# Altium PCB pcb_imge.PcbDoc
Units mm, origin at the board's own origin, x right, y up, seen from the top; angles counter-clockwise.
Board outline 152.4 x 101.6 mm, 2 copper layers (Top Layer, Bottom Layer); 12 components, 15 nets, 62 pads, 13 vias.
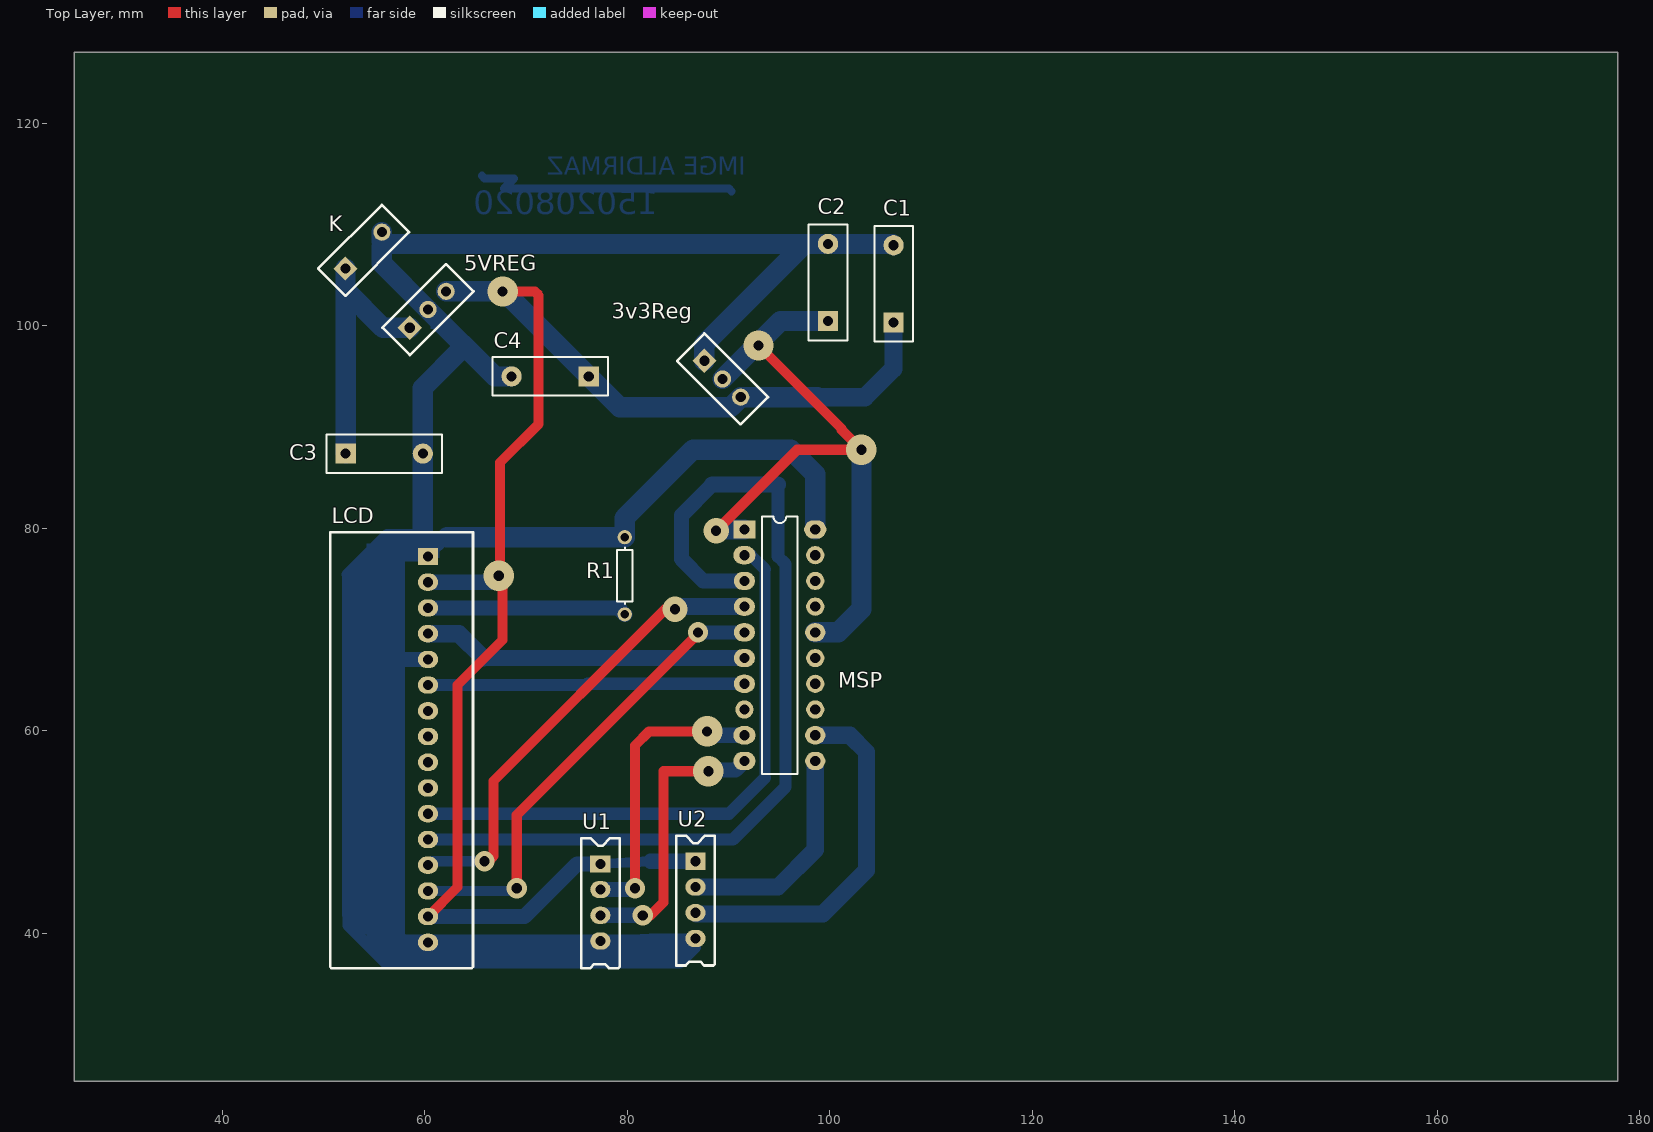
[diagram p0: Top Layer view]
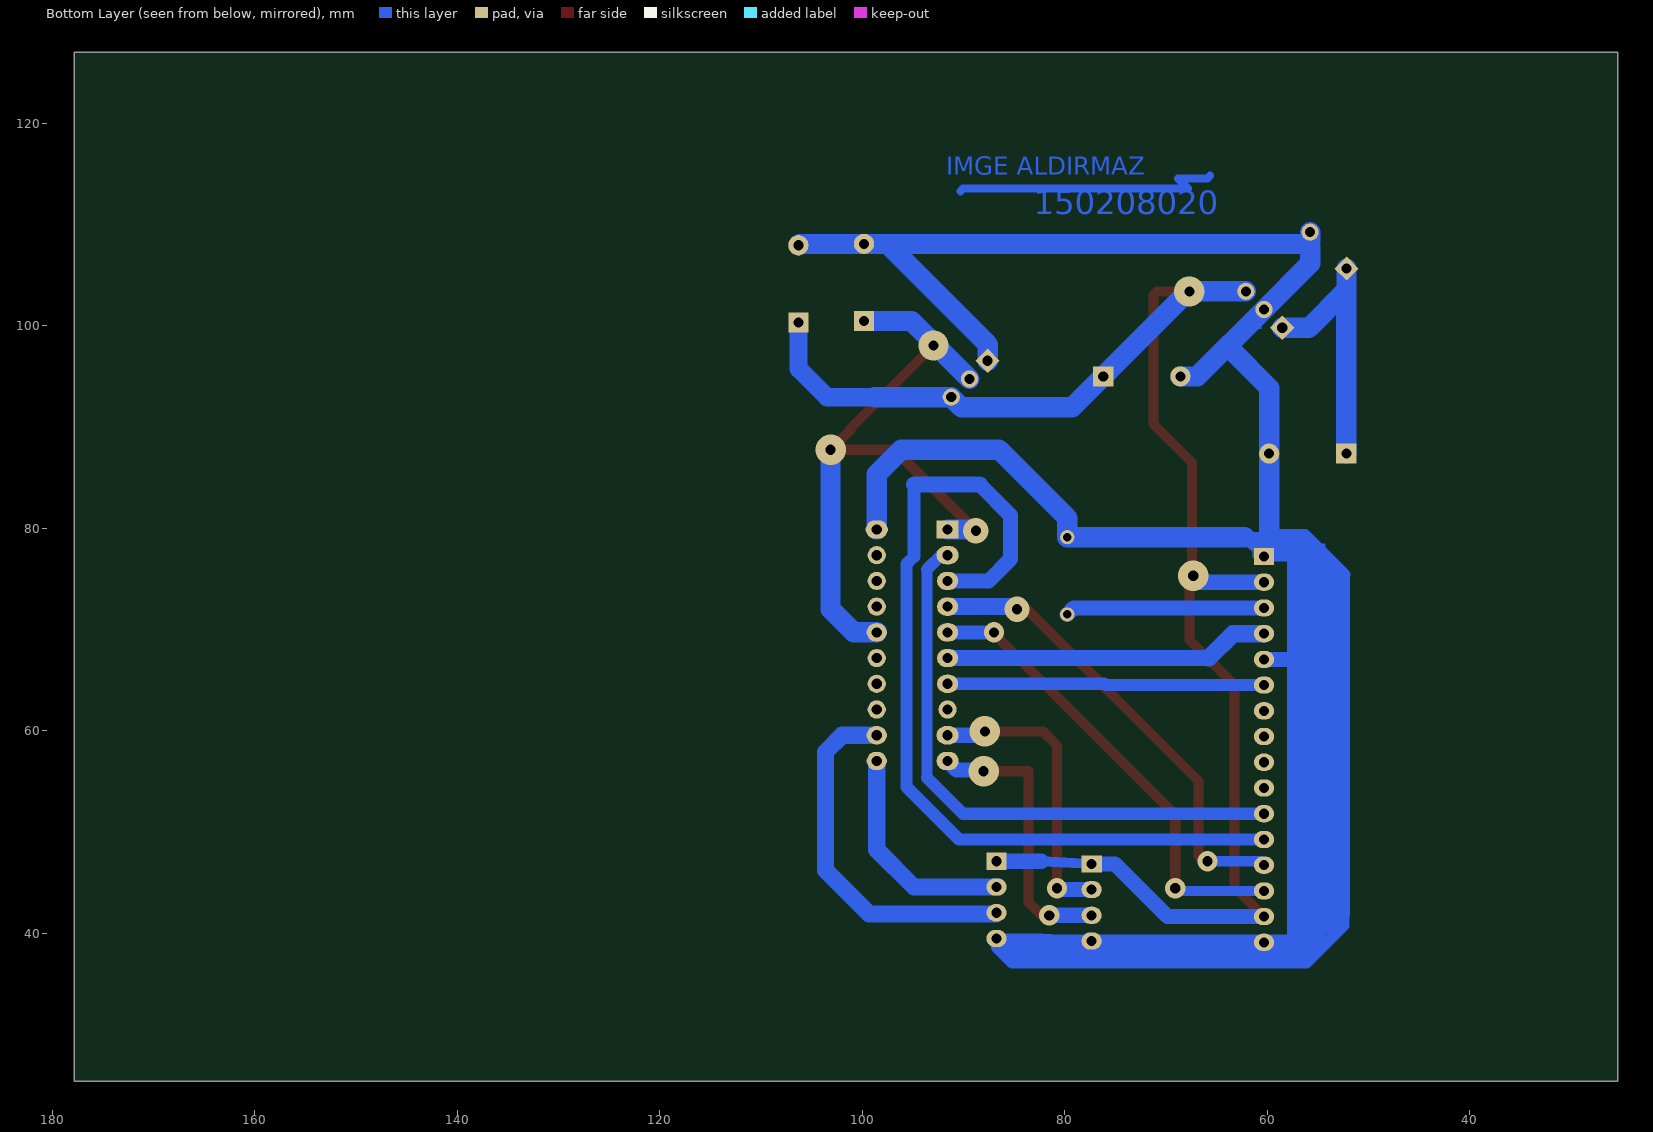
[diagram p1: Bottom Layer view, seen from below]

## Layer stack, top to bottom
Top Solder: solder mask 0.0102, Solder Resist, Dk 3.5
Top Layer: signal copper 0.0356
Dielectric 1: dielectric 0.32, FR-4, Dk 4.8
Bottom Layer: signal copper 0.0356
Bottom Solder: solder mask 0.0102, Solder Resist, Dk 3.5

## Board outline
25.4,25.4 177.8,25.4 177.8,127 25.4,127

## Design rules (kind name [scope] priority, off if disabled: settings)
Clearance [All] p1: gap=0.254
PolygonConnect [All] p1: connectstyle=Relief reliefconductorwidth=0.254 reliefentries=4 polygonreliefangle="90 Angle" airgapwidth=0.254
RoutingVias [All] p1: holewidth=0.711 width=1.27 viastyle="Through Hole" minholewidth=0.711 minwidth=1.27 maxholewidth=0.711 maxwidth=1.27
SolderMaskExpansion [All] p1: expansion=0.102
UnpouredPolygon [All] p1: allowunpoured=FALSE
Width [All] p1: maxlimit=2 minlimit=0.8 preferedwidth=1 minimp=50.000000 maximp=50.000000 favimp=50.000000
29 further rules are at their usual default settings.

## Components (designator, comment, footprint, x,y, rotation, side; value= is the part's Value field where it differs from the comment)
3v3Reg "LM1117" 3v3_Reg_ 89.408,94.742 r315 top
5VREG "LM7805" 5V_REG 60.325,101.6 r45 top
C1 "Cap" RAD-0.3 106.299,104.14 r270 top
C2 "Cap" RAD-0.3 99.822,104.267 r270 top
C3 "Cap" RAD-0.3 56.007,87.376 r180 top
C4 "Cap" RAD-0.3 72.39,94.996 r0 top
K "Klements" Klements 53.975,107.442 r45 top
LCD "LCD" LCD 60.325,77.216 r0 top
MSP "MSP430G2553" MSP430G2553_FP 91.567,79.883 r0 top
R1 "Res1" AXIAL-0.3 79.756,75.311 r270 top
U1 "Ultrasonic" Ultasonik_FP 77.343,41.783 r270 top
U2 "Ultrasonic" Ultasonik_FP 86.741,42.037 r270 top

## Footprints (in the part's own frame and the unit in brackets; to place one, negate y for a bottom-side part, rotate by r counter-clockwise, add the part's x,y. Pads: shape width x height; smd on the part's side, far side on the other; paste and mask are expansions set on the pad)
3v3_Reg_ [mm]
  rect 1.7x1.7 hole 1: 0(-2.54,0)
  round 1.7 hole 1: 1(0,0) 2(2.54,0)
  silkscreen extent -4.44,-1.9 4.44,1.9, body extent -4.45,-1.9 4.45,1.9, height 6
5V_REG [mm]
  rect 1.7x1.7 hole 1: 0(-2.54,0)
  round 1.7 hole 1: 1(0,0) 2(2.54,0)
  silkscreen extent -4.44,-1.9 4.44,1.9, body extent -4.45,-1.9 4.45,1.9, height 6
AXIAL-0.3 [mm] "Axial Device, Thru-Hole; 2 Leads; 0.3 in Pin Spacing"
  round 1.4 hole 0.85: 1(-3.81,0) 2(3.81,0)
  silkscreen extent -2.77,-0.76 2.77,0.76
Klements [mm]
  rect 1.7x1.7 hole 1: 1(-2.54,0)
  round 1.7 hole 1: 2(2.54,0)
  silkscreen extent -4.44,-1.9 4.44,1.9, body extent -4.45,-1.9 4.45,1.9, height 6
LCD [mm]
  rect 2x1.7 hole 1: 1(0,0)
  oval 2x1.7 hole 1: 2(0,-2.54) 3(0,-5.08) 4(0,-7.62) 5(0,-10.16) 6(0,-12.7) 7(0,-15.24) 8(0,-17.78) 9(0,-20.32) 10(0,-22.86) 11(0,-25.4) 12(0,-27.94) 13(0,-30.48) 14(0,-33.02) 15(0,-35.56) 16(0,-38.1)
  silkscreen extent -9.65,-40.64 4.44,2.41, body extent -9.53,-40.64 4.32,2.41, height 6
MSP430G2553_FP [mm]
  rect 2.2x1.8 hole 1: 1(0,0)
  oval 2.2x1.8 hole 1: 2(0,-2.54) 9(0,-20.32) 10(0,-22.86) 20(7,0)
  oval 2.1x1.8 hole 1: 3(0,-5.08) 4(0,-7.62) 5(0,-10.16) 6(0,-12.7) 7(0,-15.24)
  round 1.8 hole 1: 8(0,-17.78) 13(7,-17.78) 14(7,-15.24) 15(7,-12.7) 17(7,-7.62) 18(7,-5.08) 19(7,-2.54)
  oval 2x1.8 hole 1: 11(7,-22.86) 12(7,-20.32) 16(7,-10.16)
  silkscreen extent 1.74,-24.13 5.27,1.27
RAD-0.3 [mm] "Radial Cap, Thru-Hole; 2 Leads; 0.3 in Pin Spacing"
  round 2 hole 1: 1(-3.81,0)
  rect 2x2 hole 1: 2(3.81,0)
  silkscreen extent -5.71,-1.91 5.71,1.91
Ultasonik_FP [mm]
  rect 1.7x2 hole 1: 1(-5.08,0)
  oval 1.7x2 hole 1: 2(-2.54,0) 3(0,0) 4(2.54,0)
  silkscreen extent -7.62,-1.91 5.21,1.91, body extent -7.75,-2.03 5.21,1.91, height 6

## Part data
C1 C2 C3 C4: "Capacitor"
R1: "Resistor"

## Via types
v1: diameter 3, hole 1, Top Layer to Bottom Layer, 6 vias
v2: diameter 2, hole 1, Top Layer to Bottom Layer, 5 vias
v3: diameter 2.5, hole 1, Top Layer to Bottom Layer, 2 vias

## Nets (pads, with @x,y where several pads share a name; then routed paths per layer and width w, separated by ;. In a path a pad name is that pad's centre, name@x,y a point inside that pad or via, vN(x,y) a via of type N, cw(c..) or ccw(c..) an arc to the next point about the centre after c; other vN are vias at no path point)
3V3: 3v3Reg.1 C2.2 MSP.1 MSP.16 | length 69.3
  Top Layer w1: v3(88.773,79.756) 96.774,87.757 v1(103.124,87.757) 101.155,89.725 ; MSP.1@91.313,79.629 MSP.1 ; v1(92.964,98.044) 101.155,89.852
  Bottom Layer w1: v3(88.773,79.756) v3@88.9,79.883
  Bottom Layer w2: v3@88.9,79.883 MSP.1 ; 3v3Reg.1 95.123,100.457 C2.2 ; MSP.16 100.838,69.723 103.124,72.009 v1(103.124,87.757)
5V: 3v3Reg.2 5VREG.2 C1.2 C4.2 LCD.2 LCD.15 U1.1 U2.1 | length 160.9
  Top Layer w1: LCD.15 63.246,44.577 63.246,64.516 67.691,68.961 67.691,74.93 v1@67.437,75.184 ; v1(67.31,75.311) v1@67.437,75.184 ; v1(67.691,103.378) 70.866,103.378 71.247,102.997 71.247,90.297 67.437,86.487 v1@67.437,75.184
  Bottom Layer w1: v1@66.675,74.676 v1(67.31,75.311) ; U1.1 82.296,47.117
  Bottom Layer w1.5: LCD.15 69.85,41.656 75.057,46.863 U1.1 ; LCD.2 v1@66.675,74.676 ; 82.296,47.117 U2.1
  Bottom Layer w1.8: 98.788,92.946 103.487,92.946 106.299,95.758 C1.2
  Bottom Layer w2: 5VREG.2 67.8,103.396 C4.2 79.248,91.948 90.206,91.948 3v3Reg.2 98.788,92.946
9V: 5VREG.0 C3.2 K.1 | length 26.1
  Bottom Layer w2: K.1 52.179,103.505 52.197,103.487 ; C3.2 52.197,103.487 ; 5VREG.0 55.88,99.804 52.197,103.487
GND: 3v3Reg.0 5VREG.1 C1.1 C2.1 C3.1 C4.1 K.2 LCD.1 LCD.5 LCD.16 MSP.20 R1.1 U1.4 U2.4 | length 280.9
  Bottom Layer w1: 56.896,67.056 56.769,67.183 ; 62.23,79.121 LCD.1 56.769,77.216 56.769,67.183 ; U2.4 82.296,39.497 U1.4 68.961,39.243 LCD.16 58.166,39.116 56.769,40.513 56.769,67.183
  Bottom Layer w1.1: 52.324,75.438 56.261,79.375 59.563,79.375 ; 52.451,41.91 52.451,40.767 56.134,37.084 85.217,37.084 86.741,38.608 U2.4 ; LCD.1@59.817,77.724 LCD.1
  Bottom Layer w1.5: 56.896,67.056 LCD.5
  Bottom Layer w2: K.2 55.771,108.331 56.025,108.077 ; LCD.1@59.817,77.724 C3.1 59.817,93.853 63.627,97.663 ; 62.23,79.121 R1.1 79.756,81.026 86.487,87.757 96.139,87.757 98.567,85.329 MSP.20 ; C4.1 66.929,94.996 5VREG.1 55.771,106.154 55.771,107.823 56.025,108.077 ; 3v3Reg.0 87.612,98.153 97.536,108.077 ; C1.1 106.172,108.077 C2.1 97.536,108.077 ; 56.025,108.077 97.536,108.077
NetLCD_3: LCD.3 R1.2 | length 19.7
  Bottom Layer w1.5: LCD.3 79.121,72.136 R1.2
P1.0: LCD.11 MSP.2 | length 57.9
  Bottom Layer w1: MSP.2 MSP.2@92.202,77.343
  Bottom Layer w1.1: 93.599,55.372 93.599,75.946
  Bottom Layer w1.2: LCD.11 90.043,51.816 93.599,55.372 ; MSP.2@92.202,77.343 93.599,75.946
P1.1: LCD.12 MSP.3 | length 89.9
  Bottom Layer w1.2: LCD.12 90.449,49.276 95.631,54.458 95.631,76.479 94.869,77.241
  Bottom Layer w1.3: 94.869,77.241 94.869,84.328
  Bottom Layer w1.5: 88.392,84.328 85.344,81.28 85.344,76.962 87.503,74.803 MSP.3
  Bottom Layer w1.6: 88.392,84.328 94.869,84.328
P1.2: LCD.13 MSP.4 | length 46.2
  Top Layer w1: v2(65.913,47.117) 66.294,47.117 66.802,47.625 66.802,55.054 83.757,72.009 v3(84.709,72.009)
  Bottom Layer w1: LCD.13 60.706,47.117 v2(65.913,47.117) ; v3(84.709,72.009) v3@84.963,72.263
  Bottom Layer w1.7: v3@84.963,72.263 MSP.4
P1.3: LCD.14 MSP.5 | length 46.1
  Top Layer w1: v2(69.088,44.45) 69.088,51.689 86.995,69.596 v2(86.995,69.723)
  Bottom Layer w1: LCD.14 68.834,44.196 v2(69.088,44.45)
  Bottom Layer w1.4: v2(86.995,69.723) MSP.5
P1.4: LCD.4 MSP.6 | length 32.2
  Bottom Layer w1.6: 65.786,67.183 MSP.6
  Bottom Layer w1.7: LCD.4 63.373,69.596 65.786,67.183
P1.5: LCD.6 MSP.7 | length 31.3
  Bottom Layer w1: 75.946,64.516 76.073,64.643
  Bottom Layer w1.2: LCD.6 75.946,64.516 ; 76.073,64.643 MSP.7
U1_ECHO: MSP.10 U1.3 | length 28.1
  Top Layer w1: v2(81.534,41.783) 82.296,41.783 83.566,43.053 83.566,56.007 v1(88.011,56.007)
  Bottom Layer w1: v1(88.011,56.007) v1@88.138,56.134
  Bottom Layer w1.5: U1.3 v2(81.534,41.783) ; v1@88.138,56.134 90.678,56.134 MSP.10
U1_TRIG: MSP.9 U1.2 | length 29.1
  Top Layer w1: v2(80.772,44.45) 80.772,58.547 82.169,59.944 v1(87.884,59.944)
  Bottom Layer w1: v2@80.645,44.323 v2(80.772,44.45) ; v1(87.884,59.944) v1@88.265,59.563
  Bottom Layer w1.5: U1.2 v2@80.645,44.323 ; v1@88.265,59.563 MSP.9
U2_ECHO: MSP.12 U2.3 | length 36.2
  Bottom Layer w1.1: U2.3 U2.3@86.868,41.91
  Bottom Layer w1.7: U2.3@86.868,41.91 99.314,41.91 103.632,46.228 103.632,57.912 101.981,59.563 MSP.12
U2_TRIG: MSP.11 U2.2 | length 22.1
  Bottom Layer w1.7: U2.2 94.884,44.577 98.567,48.26 MSP.11
pads on no net: LCD.7 LCD.8 LCD.9 LCD.10 MSP.8 MSP.13 MSP.14 MSP.15 MSP.17 MSP.18 MSP.19
copper on no net: | length 27.3
  Bottom Layer w0.8: 65.659,114.808 65.913,114.554 68.834,114.554 67.818,113.538 90.043,113.538 90.297,113.284

## Other copper
Bottom Layer:
  rectangle net GND: 52.832,39.878 55.118,42.164
  rectangle net GND: 53.213,75.311 54.864,76.581
  rectangle net GND: 53.848,75.438 54.356,76.327
  rectangle net GND: 51.816,41.656 55.753,75.692
  rectangle net GND: 60.579,99.695 61.468,100.711
  rectangle net GND: 60.833,78.867 62.23,79.375
  rectangle net GND: 61.087,79.121 62.103,79.502
  rectangle net GND: 55.118,37.465 86.233,39.878
  rectangle net GND: 55.626,77.978 58.293,78.994
  rectangle net GND: 54.229,38.227 58.039,78.486
  rectangle net GND: 55.88,38.735 57.531,77.343
  rectangle net GND: 57.912,77.089 61.468,79.629
  text "IMGE ALDIRMAZ" at 91.694,114.3 h3
  text "150208020" at 83.058,110.236 h4